# Altium PCB Heatedbed.PcbDoc
Units mm, origin at the board's own origin, x right, y up, seen from the top; angles counter-clockwise.
Board outline 257 x 229 mm, 2 copper layers (Top Layer, Bottom Layer); 12 components, 3 nets, 16 pads, 0 vias.
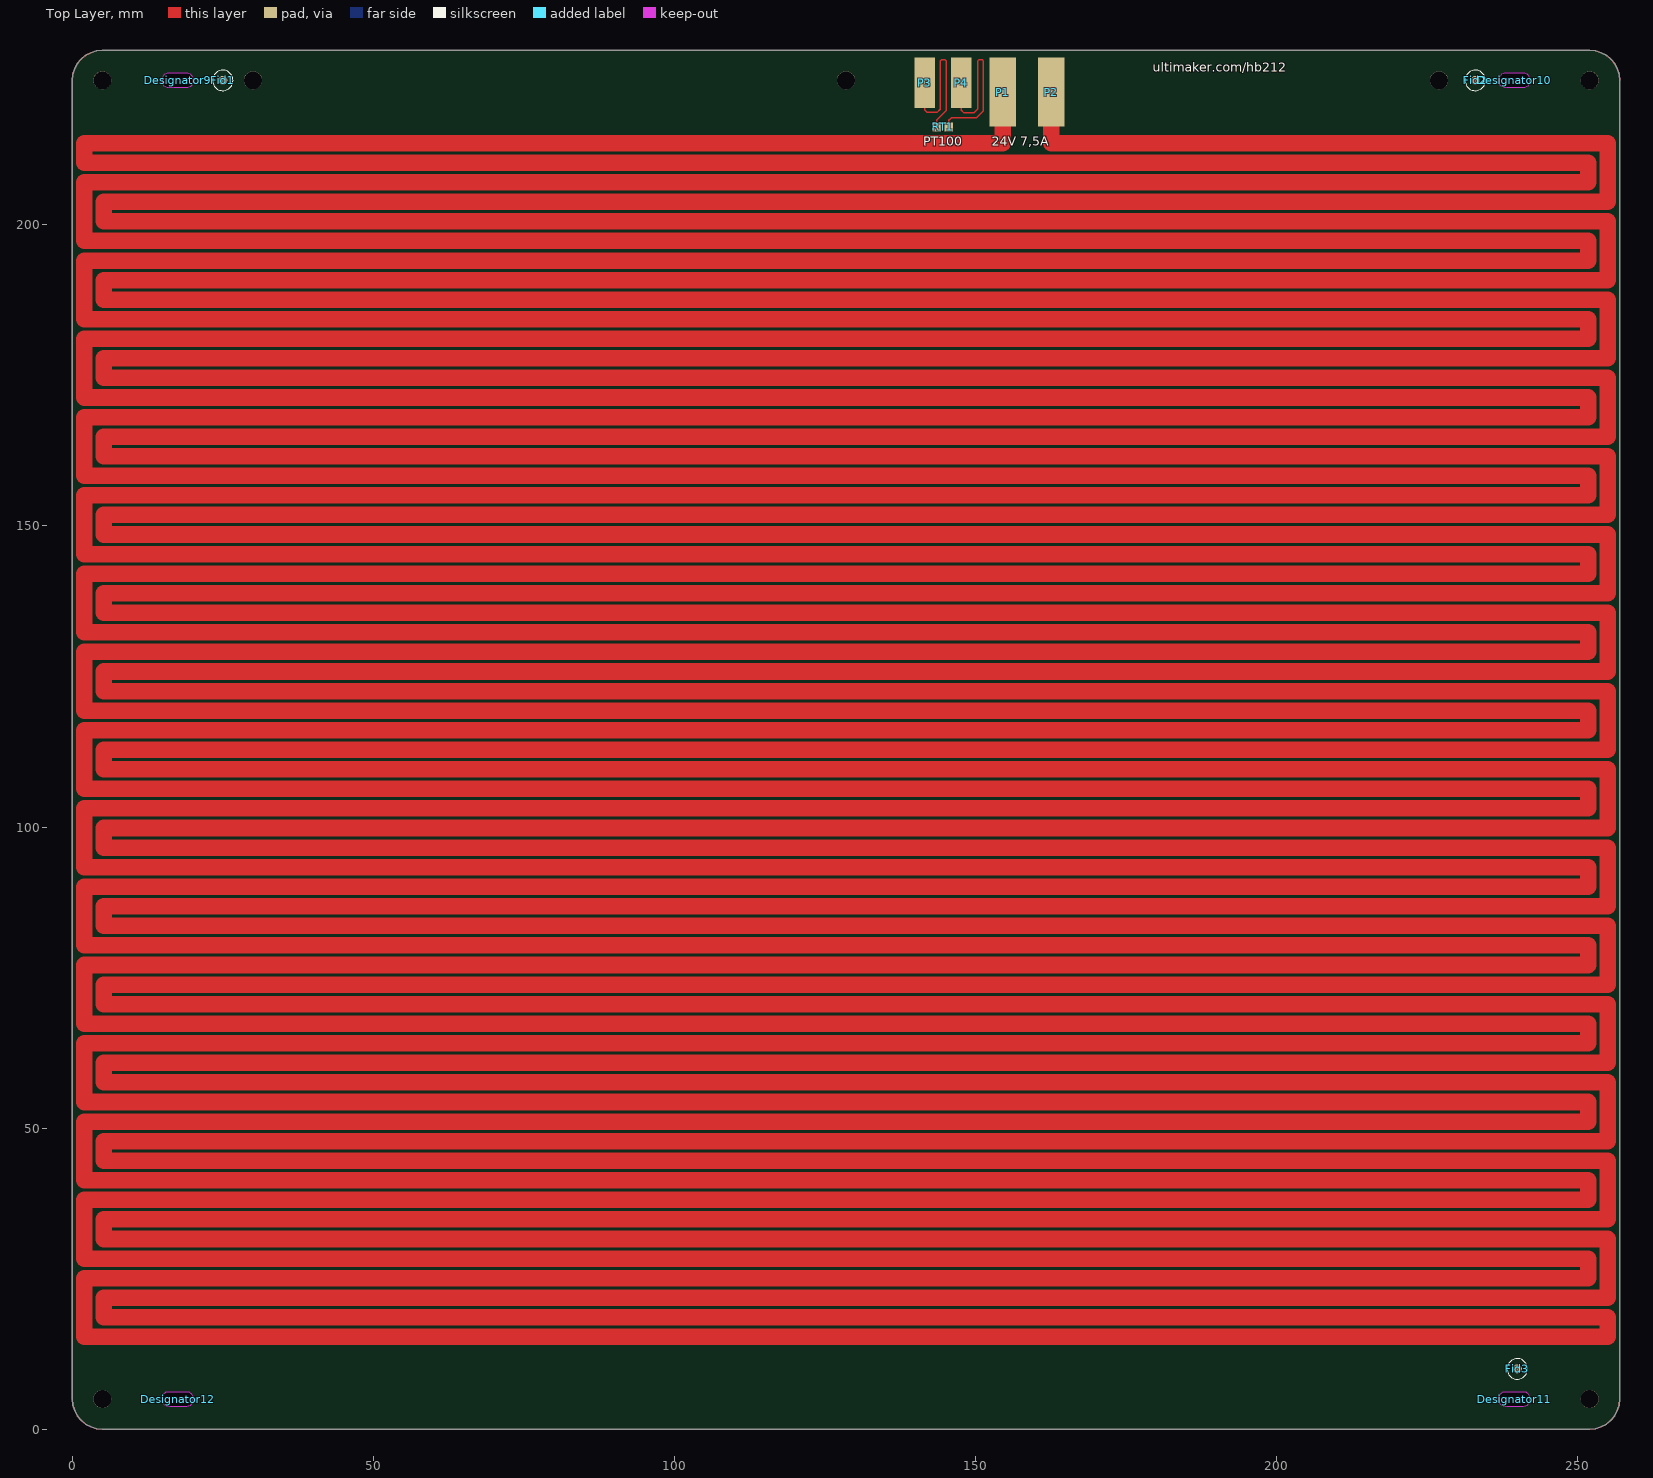
[diagram p0: Top Layer view]
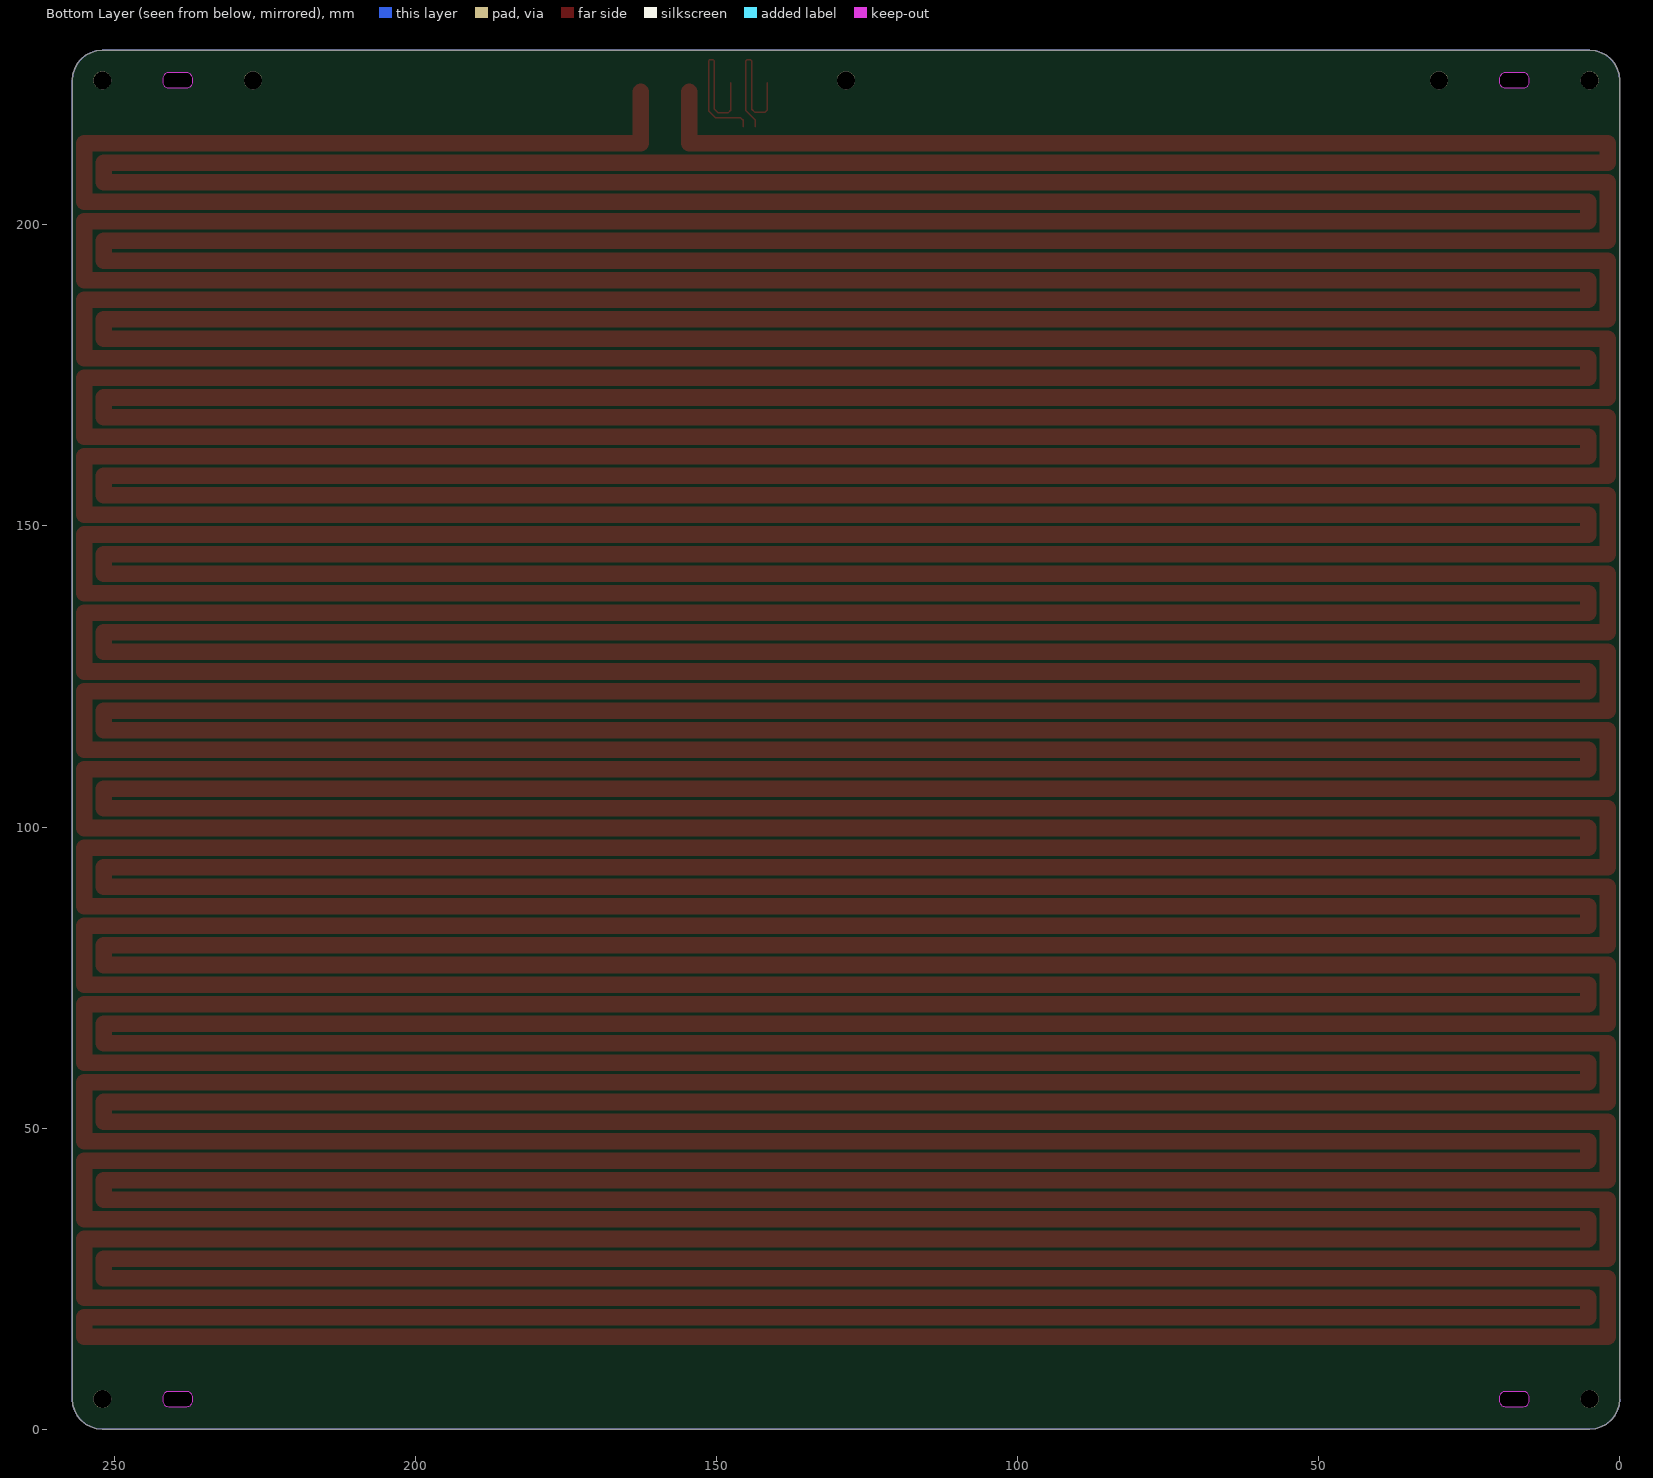
[diagram p1: Bottom Layer view, seen from below]

## Layer stack, top to bottom
Top Solder: solder mask 0.0102, Solder Resist, Dk 3.5
Top Layer: signal copper 0.0356
Dielectric 1: dielectric 0.32, FR-4, Dk 4.8
Bottom Layer: signal copper 0.0356
Bottom Solder: solder mask 0.0102, Solder Resist, Dk 3.5

## Board outline
0.381,3.086 0.097,4.023 0,4.999 0,224.002 0.097,224.978 0.381,225.915 0.843,226.779 1.463,227.538 2.222,228.158 3.086,228.62 4.023,228.905 5.001,229.001 251.998,229.001 252.976,228.905 253.914,228.62 254.777,228.158 255.534,227.538 256.156,226.779 256.619,225.915 256.903,224.978 257,224.002 257,4.999 256.903,4.023 256.619,3.086 256.156,2.222 255.534,1.463 254.777,0.841 253.914,0.381 252.976,0.094 251.998,0 5.002,0 4.023,0.094 3.086,0.381 2.222,0.841 1.463,1.463 0.843,2.222

## Design rules (kind name [scope] priority, off if disabled: settings)
Clearance [All] p1: gap=0.203
HoleSize [All] p1: absolutevalues=TRUE maxlimit=4.3 minlimit=0.025 maxpercent=80.000 minpercent=20.000
MinimumSolderMaskSliver [All] p1 off: minsoldermaskwidth=0.051
PlaneClearance [All] p1: clearance=0.203
PlaneConnect [All] p1: planeconnectstyle=Relief reliefexpansion=0.203 reliefentries=4 reliefconductorwidth=0.203 reliefairgap=0.203
PolygonConnect [All] p1: connectstyle=Relief reliefconductorwidth=0.254 reliefentries=4 polygonreliefangle="90 Angle" airgapwidth=0.254
RoomDefinition Heatedbed [InComponentClass('Heatedbed')] p1 off: confinementstyle=ConfineIn formatcopy=TRUE lockcomponents=FALSE outline 301.042,-142.701 318.392,-142.701 318.392,-138.126 301.042,-138.126
RoutingVias [All] p1: holewidth=0.3 width=0.6 viastyle="Through Hole" minholewidth=0.3 minwidth=0.6 maxholewidth=1 maxwidth=3
SilkToSilkClearance [All] p1: silktosilkclearance=0
SilkToSolderMaskClearance SilkscreenOverComponentPads [IsPad] p1: minsilkscreentomaskgap=0.127 clearancetoexposedcopper=TRUE
SolderMaskExpansion [All] p1: expansion=0.102
Width [All] p1: maxlimit=10 minlimit=0.203 preferedwidth=0.203
24 further rules are at their usual default settings.

## Classes and differential pairs
component class Heatedbed: Fid1 Fid2 Fid3 P1 P2 P3 P4 RT1

## Components (designator, comment, footprint, x,y, rotation, side; value= is the part's Value field where it differs from the comment)
Designator9 "Comment" Hole 17.5,224 r0 top locked
Designator10 "Comment" Hole 239.5,224 r0 top locked
Designator11 "Comment" Hole 239.5,5 r0 top locked
Designator12 "Comment" Hole 17.5,5 r0 top locked
Fid1 "Fiducial" FIDUCIAL 25,224 r0 top locked
Fid2 "Fiducial" FIDUCIAL 233,224 r0 top locked
Fid3 "Fiducial" FIDUCIAL 240,10 r0 top locked
P1 "Power 1" "AVX POKE HOME CONTACT" 154.56,222.069 r90 top locked
P2 "Power 2" "AVX POKE HOME CONTACT" 162.56,222.069 r90 top locked
P3 "PT100 1" "AVX POKE HOME CONTACT 3MM" 141.6,223.575 r90 top
P4 "PT100 2" "AVX POKE HOME CONTACT 3MM" 147.65,223.575 r90 top
RT1 "PT100 0805" 6-0805_M 144.575,216.275 r0 top locked

## Footprints (in the part's own frame and the unit in brackets; to place one, negate y for a bottom-side part, rotate by r counter-clockwise, add the part's x,y. Pads: shape width x height; smd on the part's side, far side on the other; paste and mask are expansions set on the pad)
6-0805_M [mm] "Chip Resistor, Body 2.0x1.2mm, IPC Low Density"
  rect 1.4x1.5 smd: 1(-1,0) 2(1,0)
  silkscreen extent 0,-0.65 0,0.65, body extent -1.07,-0.7 1.07,0.7, height 0.7
"AVX POKE HOME CONTACT" [mm] "AVX 70-9296-001-004-006"
  rect 11.4x4.4 smd: 1(0,0)
  body extent -5.5,-2 5.5,2, height 4
"AVX POKE HOME CONTACT 3MM" [mm] "AVX 70-9296-001-003-006"
  rect 8.4x3.4 smd: 1(0,0)
  body extent -4,-1.5 4,1.5, height 3
FIDUCIAL [mm] "Fiducial"
  round 1.5 smd paste-20 mask+0.9: ""(0,0)
  silkscreen extent -1.7,-1.7 1.7,1.7
Hole [mm]
  Keep-Out Layer board cut-out: -2.331,-0.805 -2.424,-0.633 -2.481,-0.445 -2.499,-0.25 -2.499,0.25 -2.481,0.445 -2.424,0.633 -2.331,0.806 -2.207,0.957 -2.055,1.081 -1.882,1.174 -1.695,1.23 -1.5,1.25 1.5,1.25 1.696,1.23 1.883,1.174 2.057,1.081 2.207,0.957 2.333,0.806 2.425,0.633 2.481,0.445 2.501,0.25 2.501,-0.25 2.481,-0.445 2.425,-0.633 2.333,-0.805 2.207,-0.956 2.057,-1.082 1.883,-1.174 1.696,-1.231 1.5,-1.25 -1.5,-1.25 -1.695,-1.231 -1.882,-1.174 -2.055,-1.082 -2.207,-0.956

## Part data
Fid1 Fid2 Fid3: library part Library_MISC-0003
P1 P2 P3 P4: library part Plug, "Plug"
RT1: library part "Res Thermal", "Thermistor"

## Free pads (board coordinates)
  round 3 hole 3 unplated: 0(5,5) 0(5,224) 0(30,224) 0(128.5,224) 0(227,224) 0(252,5) 0(252,224)

## Nets (pads, with @x,y where several pads share a name; then routed paths per layer and width w, separated by ;. In a path a pad name is that pad's centre, name@x,y a point inside that pad or via, vN(x,y) a via of type N, cw(c..) or ccw(c..) an arc to the next point about the centre after c; other vN are vias at no path point)
$Net2: P1.1 P2.1 | length 15896.4
  Top Layer w2.751: 1.994,213.589 1.994,210.332 251.744,210.332 251.744,207.081 1.994,207.081 1.994,197.333 251.744,197.333 251.744,194.081 1.994,194.081 1.994,184.333 251.744,184.333 251.744,181.082 1.994,181.082 1.994,171.333 251.744,171.333 251.744,168.082 1.994,168.082 1.994,158.333 251.744,158.333 251.744,155.082 1.994,155.082 1.994,145.331 251.744,145.331 251.744,142.083 1.994,142.083 1.994,132.331 251.744,132.331 251.744,129.083 1.994,129.083 1.994,119.332 251.744,119.332 251.744,116.083 1.994,116.083 1.994,106.332 251.744,106.332 251.744,103.083 1.994,103.083 1.994,93.332 251.744,93.332 251.744,90.081 1.994,90.081 1.994,80.333 251.744,80.333 251.744,77.081 1.994,77.081 1.994,67.333 251.744,67.333 251.744,64.082 1.994,64.082 1.994,54.333 251.744,54.333 251.744,51.082 1.994,51.082 1.994,41.333 251.744,41.333 251.744,38.082 1.994,38.082 1.994,28.331 251.744,28.331 251.744,25.082 1.994,25.082 1.994,15.331 254.993,15.331 254.993,18.583 5.245,18.583 5.245,21.831 254.993,21.831 254.993,31.582 5.245,31.582 5.245,34.831 254.993,34.831 254.993,44.582 5.245,44.582 5.245,47.833 254.993,47.833 254.993,57.582 5.245,57.582 5.245,60.833 254.993,60.833 254.993,70.582 5.245,70.582 5.245,73.833 254.993,73.833 254.993,83.581 5.245,83.581 5.245,86.832 254.993,86.832 254.993,96.584 5.245,96.584 5.245,99.832 254.993,99.832 254.993,109.583 5.245,109.583 5.245,112.832 254.993,112.832 254.993,122.583 5.245,122.583 5.245,125.832 254.993,125.832 254.993,135.583 5.245,135.583 5.245,138.831 254.993,138.831 254.993,148.582 5.245,148.582 5.245,151.831 254.993,151.831 254.993,161.582 5.245,161.582 5.245,164.833 254.993,164.833 254.993,174.582 5.245,174.582 5.245,177.833 254.993,177.833 254.993,187.582 5.245,187.582 5.245,190.833 254.993,190.833 254.993,200.581 5.245,200.581 5.245,203.832 254.993,203.832 254.993,213.594 162.56,213.594 P2.1 ; 1.994,213.594 154.56,213.594 P1.1
NetP3_1: P3.1 RT1.1 | length 28.2
  Top Layer w0.254: P3.1 141.6,219.05 141.975,218.675 143.6,218.675 144.15,219.225 144.15,227.225 144.375,227.45 144.925,227.45 145.125,227.25 145.125,218.975 143.575,217.425 RT1.1
NetP4_1: P4.1 RT1.2 | length 32.6
  Top Layer w0.254: RT1.2 145.575,217.375 145.975,217.775 150.15,217.775 151.325,218.95 151.325,227.225 151.125,227.425 150.575,227.425 150.35,227.2 150.35,219.2 149.8,218.65 148.025,218.65 147.65,219.025 P4.1
pads on no net: Fid1. Fid2. Fid3.

## Other copper
Top Layer:
  text "For more mechanical specs see 1155 specsheet" at 269.24,48.133 h3
Multi-Layer:
  the board outline again, w0.127

## Silkscreen, mask and mechanical layers (free items; w line width, h text height)
Top Overlay:
  text "ultimaker.com/hb212" at 179.451,225.425 h1.52
  text "PT100" at 141.325,213.125 h1.52
  text "24V 7,5A" at 152.675,213.125 h1.52
  text "R" at -8.382,-9.652 h200
Drill Drawing:
  lines w0.025: 270.526,38.417 271.796,38.417 271.796,39.688 270.526,39.688 270.526,38.417
  lines w0.381: 268.796,37.274 387.483,37.274 ; 268.796,41.084 387.483,41.084 ; 282.788,33.465 282.788,44.895 ; 300.512,33.465 300.512,44.895 ; 334.691,33.465 334.691,44.895 ; 354.853,33.465 354.853,44.895 ; 367.702,33.465 367.702,44.895 ; 268.796,33.465 387.483,33.465 387.483,44.895 268.796,44.895 268.796,33.465
  text "Symbol" at 271.082,42.227 h1.83
  text "Hit Count" at 283.931,42.227 h1.83
  text "Finished Hole Size" at 301.655,42.227 h1.83
  text "Tollerance" at 335.834,42.227 h1.83
  text "Plated" at 355.996,42.227 h1.83
  text "Hole Type" at 368.845,42.227 h1.83
  text "7" at 283.931,38.417 h1.52
  text "3,00mm (118,1mil)" at 301.655,38.417 h1.52
  text "+0,08/-0,00" at 335.834,38.417 h1.52
  text "NPTH" at 355.996,38.417 h1.52
  text "Round" at 368.845,38.417 h1.52
  text "7 Total" at 283.931,34.608 h1.52